# Altium PCB PCB2.PcbDoc
Units mil, origin at the board's own origin, x right, y up, seen from the top; angles counter-clockwise.
Board outline 3885 x 3930 mil, 2 copper layers (Top Layer, Bottom Layer); 38 components, 36 nets, 126 pads, 12 vias.
Unrouted connection lines stored in the file: 3.
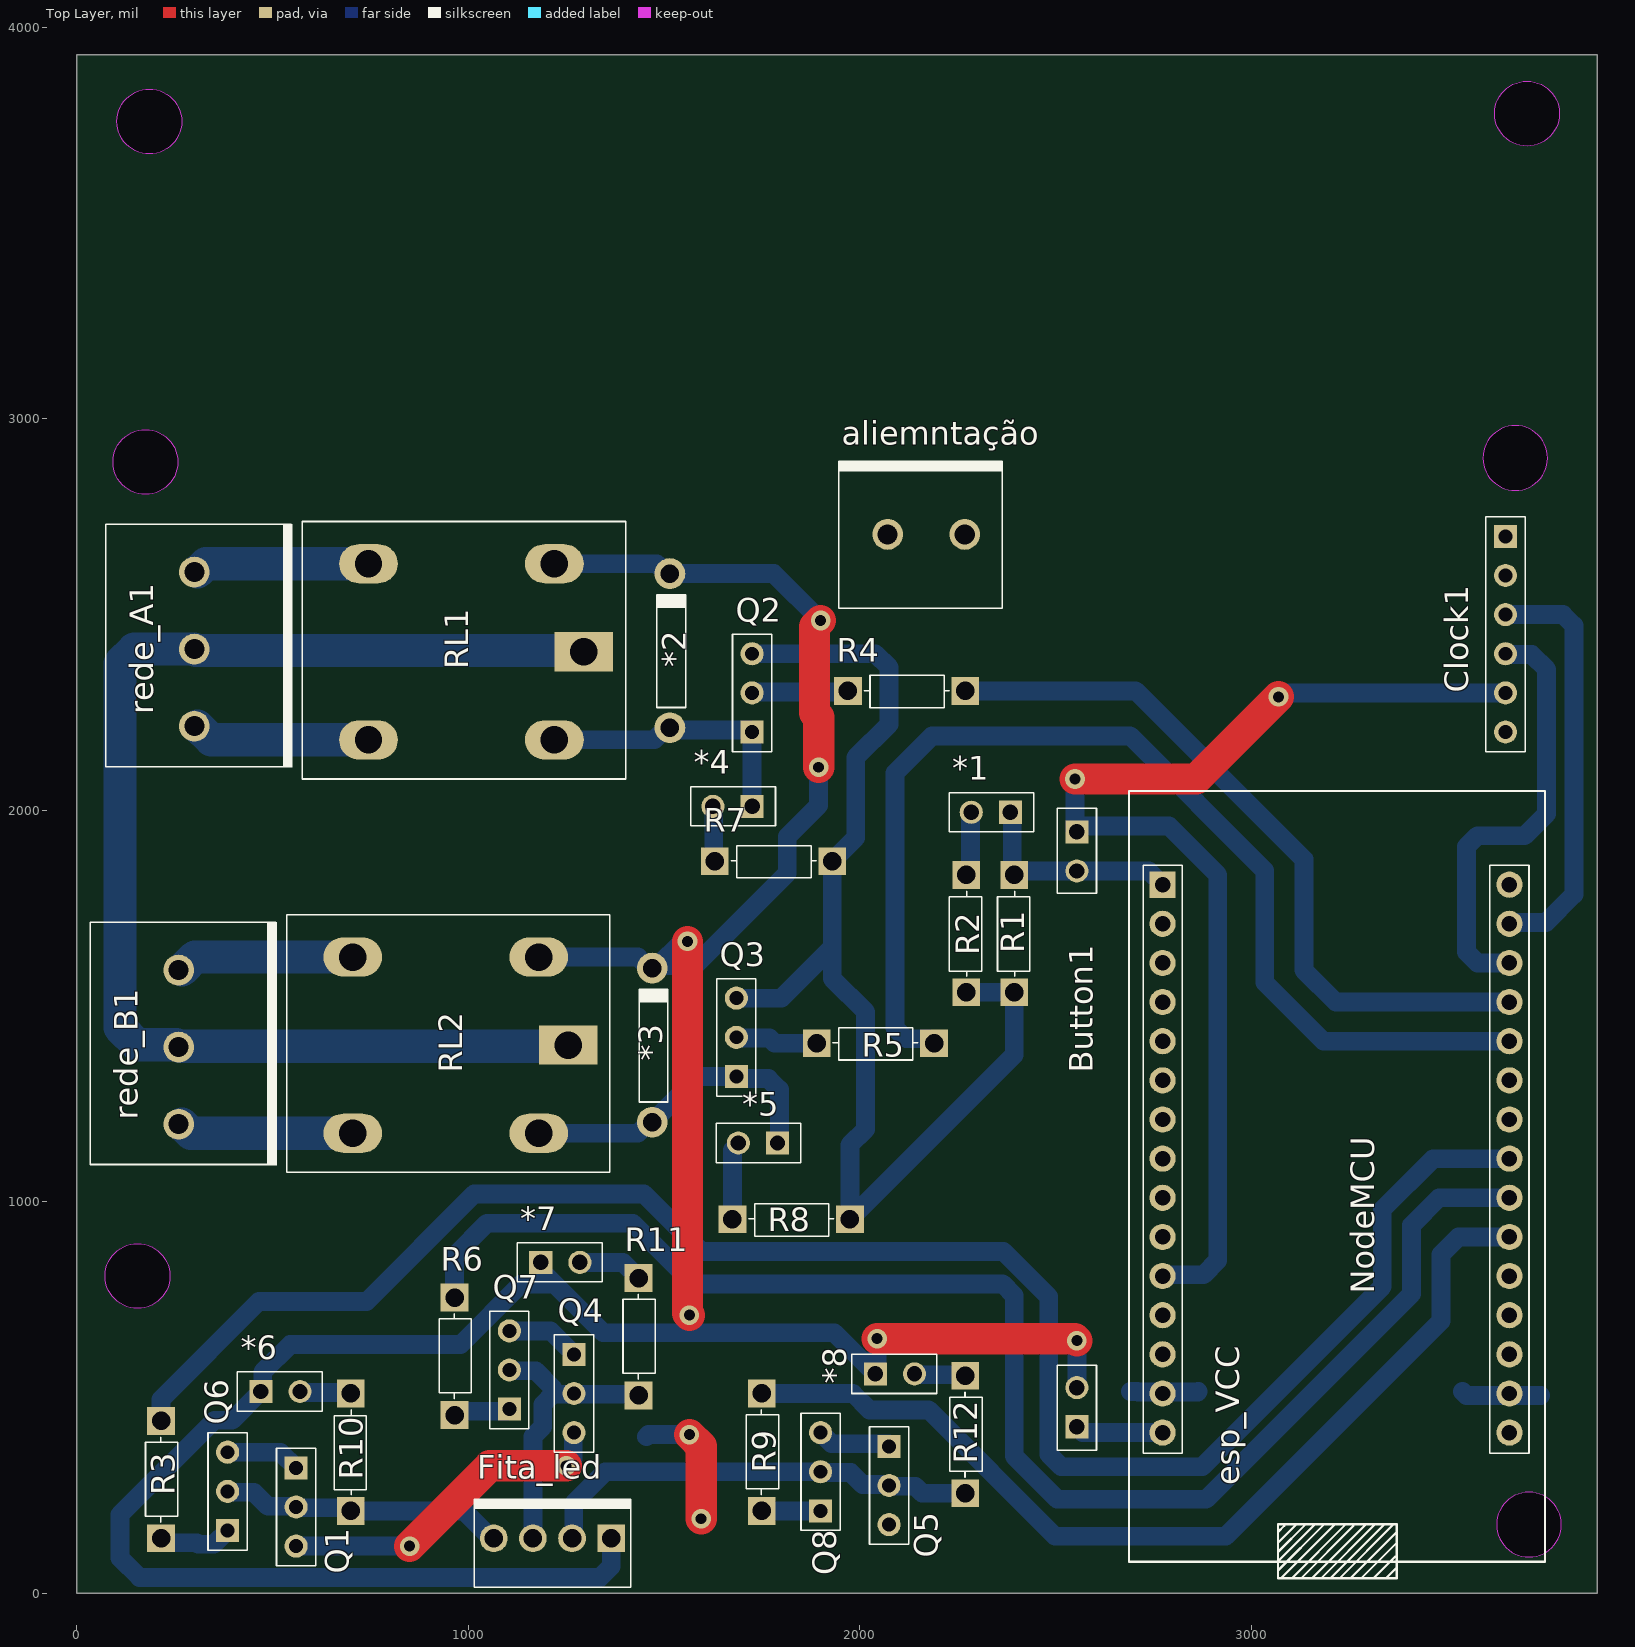
[diagram p0: Top Layer view]
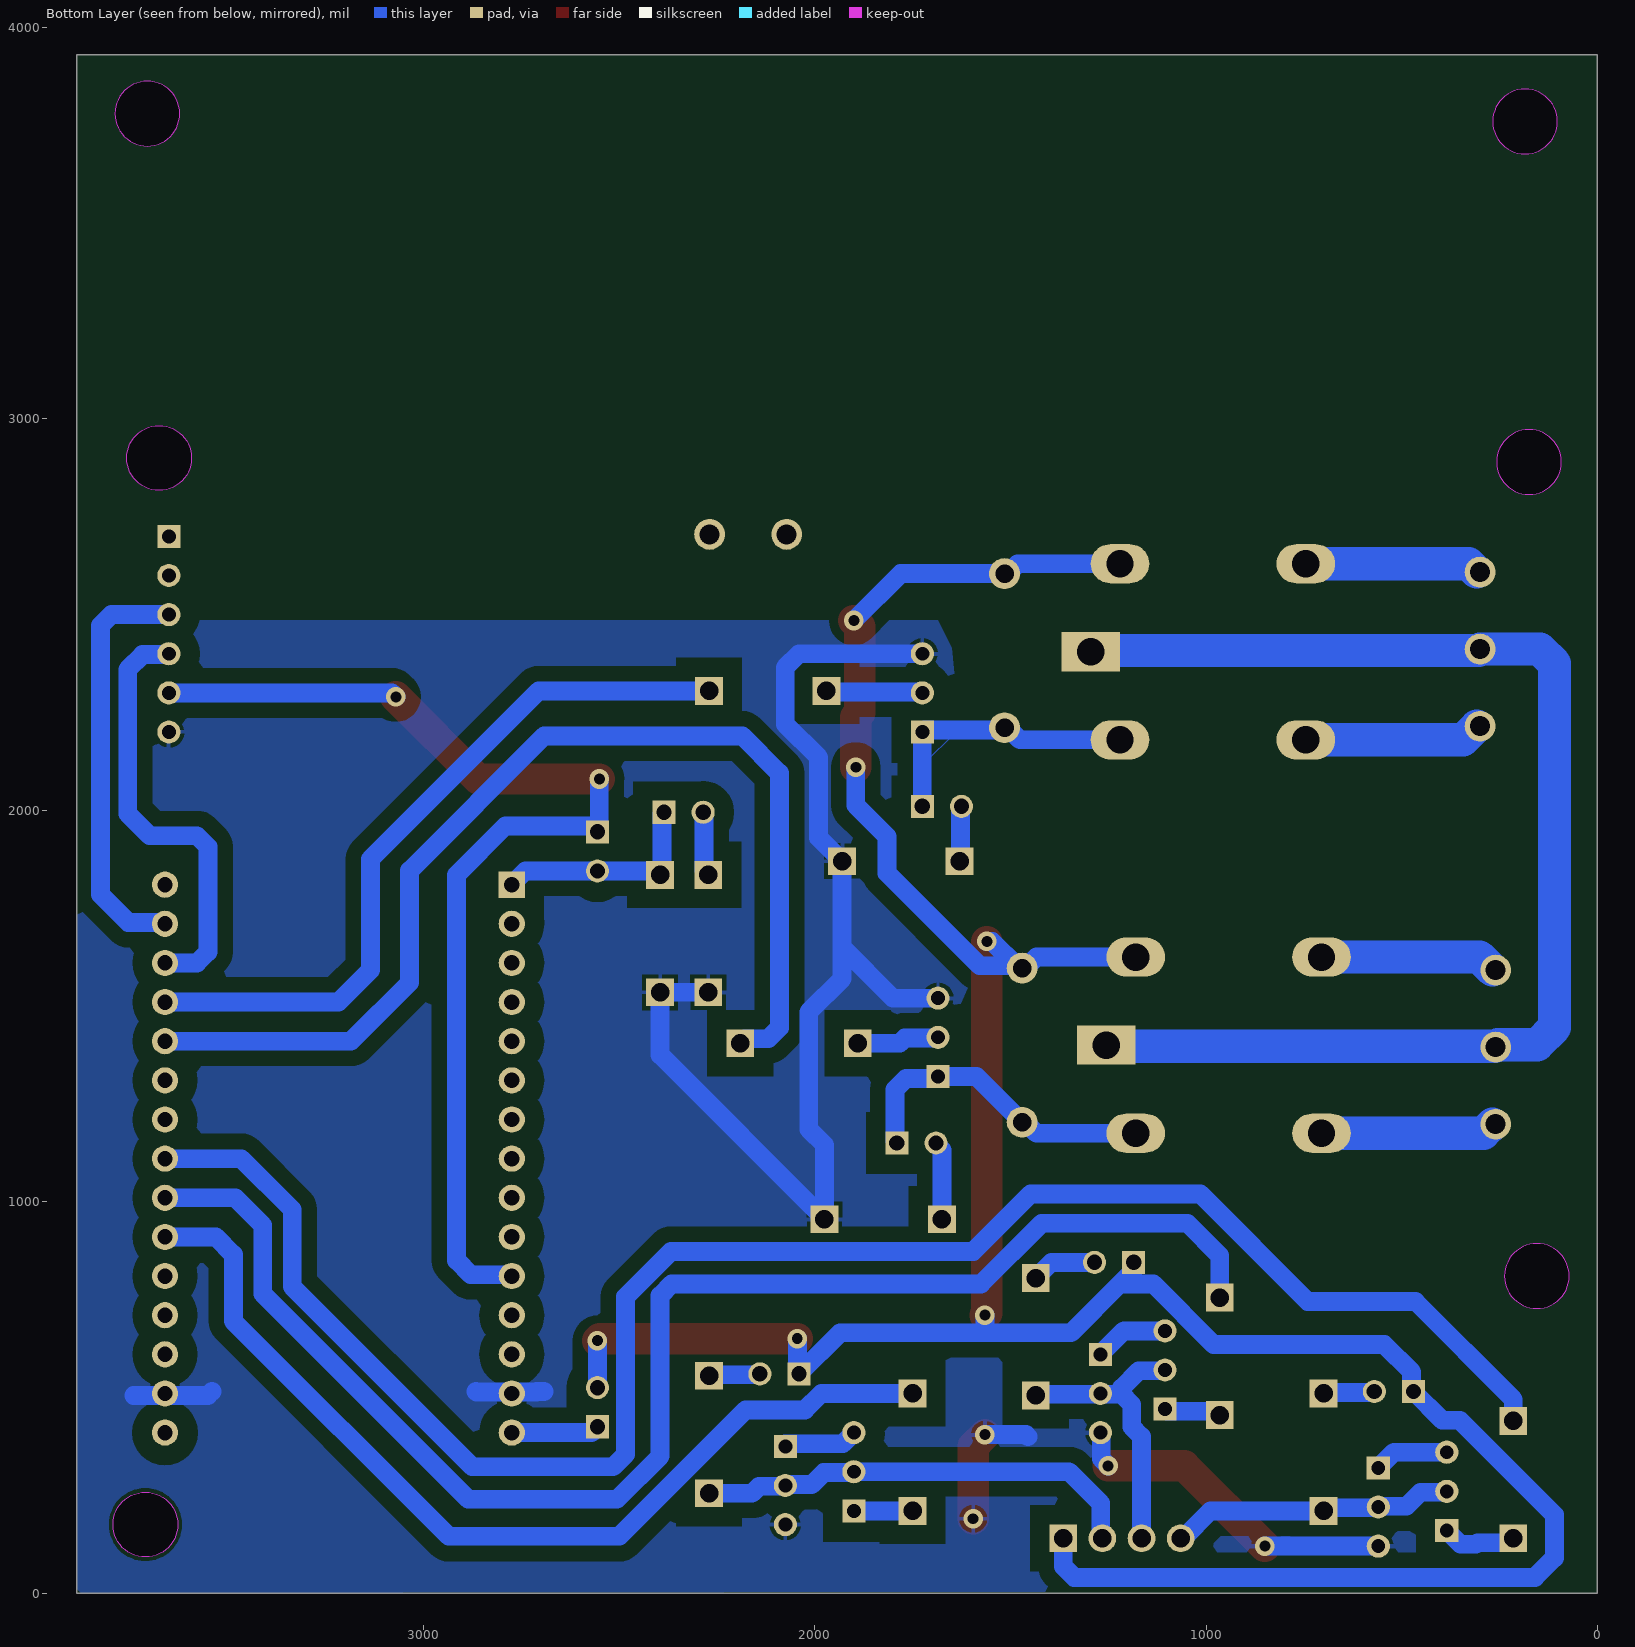
[diagram p1: Bottom Layer view, seen from below]
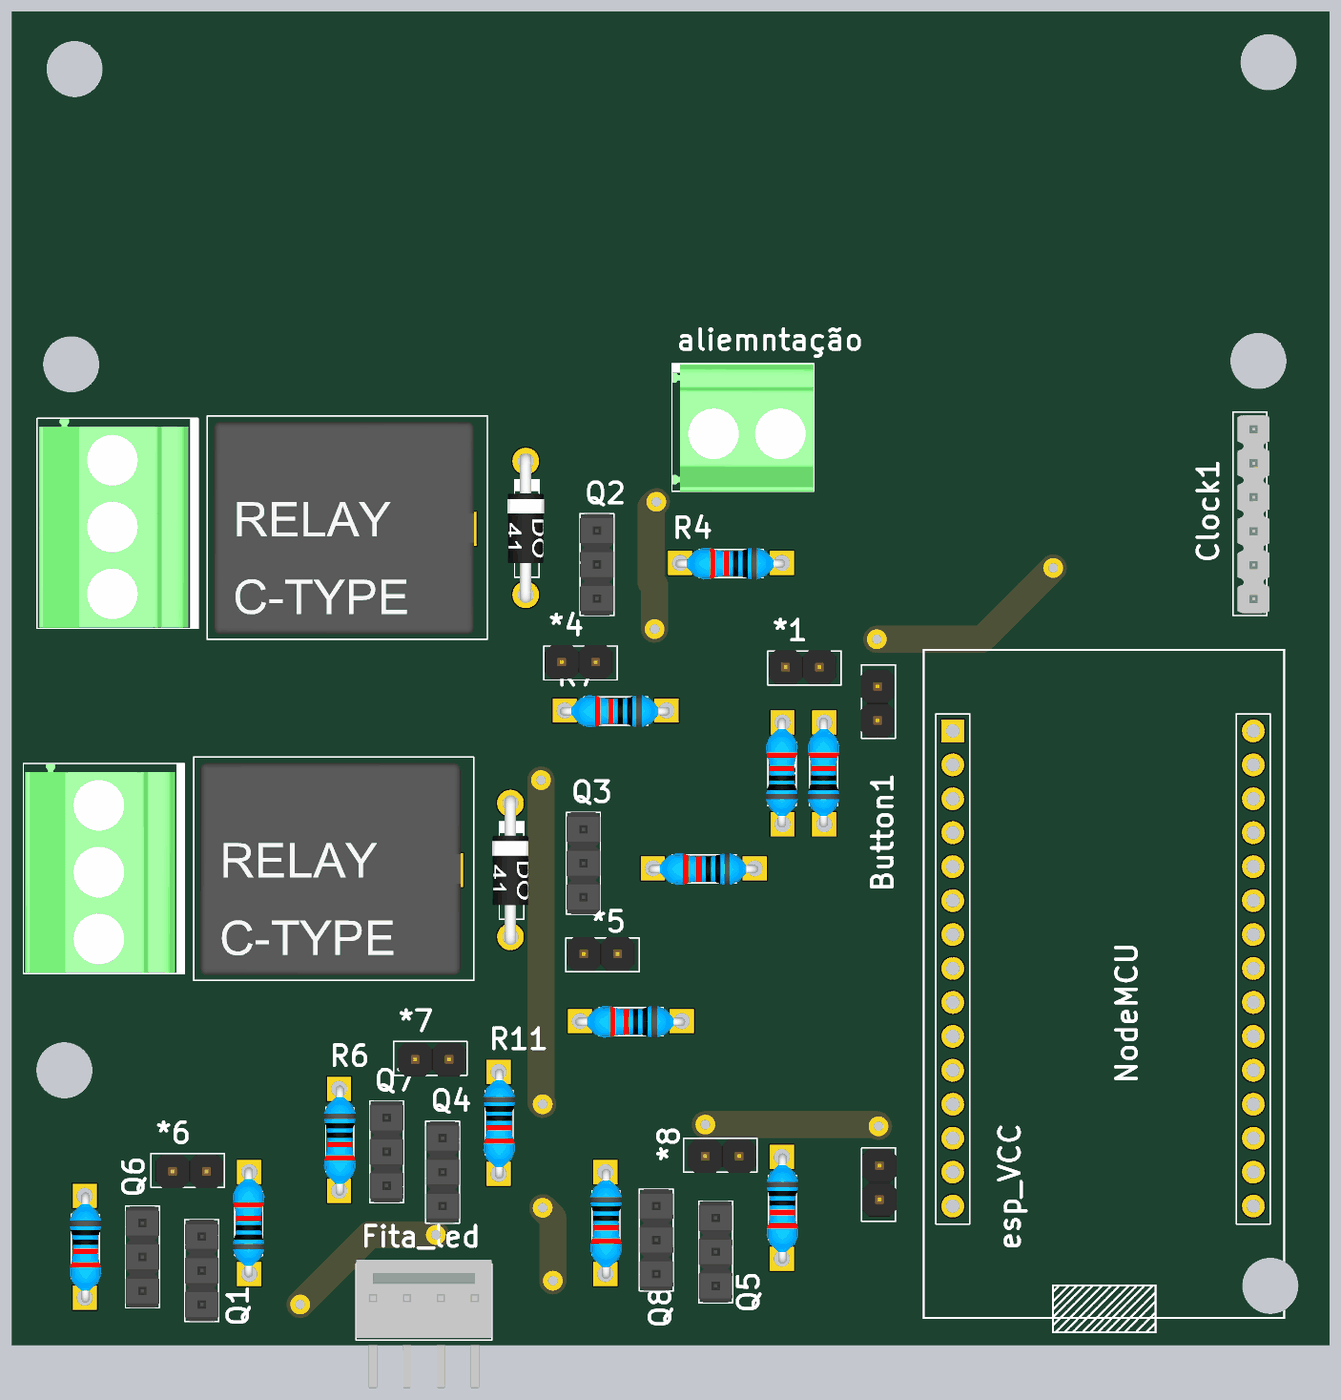
[diagram p2: 3D render of the assembled board from above, using the file's embedded part models]

## Layer stack, top to bottom
Top Solder: solder mask 0.4, Solder Resist, Dk 3.5
Top Layer: signal copper 1.4
Dielectric 1: dielectric 12.6, FR-4, Dk 4.8
Bottom Layer: signal copper 1.4
Bottom Solder: solder mask 0.4, Solder Resist, Dk 3.5

## Board outline
0,0 3885,0 3885,3930 0,3930
cut-out: 155,727.24 cw(c155,810) 72.24,810 cw(c155,810) 155,892.76 cw(c155,810) 237.76,810 cw(c155,810)
cut-out: 3627.24,175 ccw(c3710,175) 3710,92.24 ccw(c3710,175) 3792.76,175 ccw(c3710,175) 3710,257.76 ccw(c3710,175)
cut-out: 3705,3697.24 cw(c3705,3780) 3622.24,3780 cw(c3705,3780) 3705,3862.76 cw(c3705,3780) 3787.76,3780 cw(c3705,3780)
cut-out: 3592.24,2900 ccw(c3675,2900) 3675,2817.24 ccw(c3675,2900) 3757.76,2900 ccw(c3675,2900) 3675,2982.76 ccw(c3675,2900)
cut-out: 175,2807.24 cw(c175,2890) 92.24,2890 cw(c175,2890) 175,2972.76 cw(c175,2890) 257.76,2890 cw(c175,2890)
cut-out: 185,3677.24 cw(c185,3760) 102.24,3760 cw(c185,3760) 185,3842.76 cw(c185,3760) 267.76,3760 cw(c185,3760)

## Design rules (kind name [scope] priority, off if disabled: settings)
Clearance [All] p1: gap=10 ignorepadtopadclearanceinfootprint=FALSE except(0: Arc-Hole Track-Hole SMDPad-Hole THPad-Hole Via-Hole Text-Hole; 40: Arc-Fill Arc-Poly Arc-Region Track-Fill Track-Poly Track-Region; 50: THPad-Fill THPad-Poly THPad-Region Fill-Hole Poly-Hole Region-Hole)
PolygonConnect [All] p1: connectstyle=Relief reliefconductorwidth=10 reliefentries=4 polygonreliefangle="90 Angle" airgapwidth=10
RoutingVias [All] p1: holewidth=28 width=50 viastyle="Through Hole" minholewidth=28 minwidth=50 maxholewidth=28 maxwidth=50
SolderMaskExpansion [All] p1: expansion=4
Width [All] p1: maxlimit=90 minlimit=45 preferedwidth=80 toplayer_minwidth=80 toplayer_maxwidth=80 bottomlayer_prefwidth=48 minimp=50.000000 maximp=50.000000 favimp=50.000000
30 further rules are at their usual default settings.

## Classes and differential pairs
component class "Relógio digital": Clock1
component class "Relay de carga": *2 *3 *4 *5 Q2 Q3 R4 R5 R7 R8 rede_A1 rede_B1 RL1 RL2
component class "Microcontrolador ESP8266": aliemntação esp_VCC NodeMCU
component class "Fita LED": *6 *7 *8 Fita_led Q1 Q4 Q5 Q6 Q7 Q8 R3 R6 R9 R10 R11 R12
component class Botão: *1 Button1 R1 R2

## Components (designator, comment, footprint, x,y, rotation, side; value= is the part's Value field where it differs from the comment)
*1 "LED_AXIAL_5MM" HEADER_1X2 2335,1995 r180 top value=?
*2 "DIO_PTH_1N4007" DIO_PTH_DO41 1515,2407.95 r270 top value=?
*3 "DIO_PTH_1N4007" DIO_PTH_DO41 1470,1400 r270 top value=?
*4 "LED_AXIAL_5MM" HEADER_1X2 1675,2010 r180 top value=?
*5 "LED_AXIAL_5MM" HEADER_1X2 1740,1150 r180 top value=?
*6 "LED_AXIAL_5MM" HEADER_1X2 520,515 r0 top value=?
*7 "LED_AXIAL_5MM" HEADER_1X2 1235,845 r0 top value=?
*8 "LED_AXIAL_5MM" HEADER_1X2 2090,560 r0 top value=?
aliemntação "?" CN_KRE_2 2170,2705 r180 top
Button1 "?" HEADER_1X2 2555,1895 r270 top
Clock1 "HEADER_1X6" HEADER_1X6 3650,2450 r270 top value=?
esp_VCC "?" HEADER_1X2 2555,475 r90 top
Fita_led "CN_KK_4" CN_KK_4_5045-4 1215,140 r180 top value=?
NodeMCU "ESP8266 Development kit" DIV_NodeMCU_Socket 2683,77.57 r0 top
Q1 "NPN" HEADER_1X3 610,220 r270 top
Q2 "NPN" HEADER_1X3 1675,2300 r90 top
Q3 "NPN" HEADER_1X3 1635,1420 r90 top
Q4 "NPN" HEADER_1X3 1320,510 r270 top
Q5 "NPN" HEADER_1X3 2125,275 r270 top
Q6 "NPN" HEADER_1X3 335,260 r90 top
Q7 "NPN" HEADER_1X3 1055,570 r90 top
Q8 "NPN" HEADER_1X3 1850,310 r90 top
R1 "1M" RES_PTH_7.62MM 2395,1685 r90 top
R2 "" RES_PTH_7.62MM 2271.97,1685 r90 top value=330
R3 "10k" RES_PTH_7.62MM 215,290 r270 top
R4 "10k" RES_PTH_7.62MM 2120,2305 r180 top
R5 "10k" RES_PTH_7.62MM 2040,1405 r180 top
R6 "10k" RES_PTH_7.62MM 965,605 r270 top
R7 "330" RES_PTH_7.62MM 1780,1870 r180 top
R8 "330" RES_PTH_7.62MM 1825,955 r180 top
R9 "10k" RES_PTH_7.62MM 1750,360 r270 top
R10 "330" RES_PTH_7.62MM 700,360 r90 top
R11 "330" RES_PTH_7.62MM 1435,655 r270 top
R12 "330" RES_PTH_7.62MM 2270,405 r270 top
rede_A1 "?" CN_KRE_3 300,2411.85 r90 top
rede_B1 "?" CN_KRE_3 260,1395 r90 top
RL1 "RELEICR5551" DIV_RELE_5551 1020,2405 r0 top
RL2 "RELEICR5551" DIV_RELE_5551 980,1400 r0 top

## Footprints (in the part's own frame and the unit in brackets; to place one, negate y for a bottom-side part, rotate by r counter-clockwise, add the part's x,y. Pads: shape width x height; smd on the part's side, far side on the other; paste and mask are expansions set on the pad)
CN_KK_4_5045-4 [mm]
  rect 1.8x1.8 hole 1.2: 1(-3.81,0)
  round 1.8 hole 1.2: 2(-1.27,0) 3(1.27,0) 4(3.81,0)
  silkscreen extent -5.08,-2.54 5.08,3.18, body extent -5.08,-2.84 5.08,6.8, height 12.11
CN_KRE_2 [mm]
  round 2 hole 1.3: 1(-2.5,0) 2(2.5,0)
  silkscreen extent -4.93,-4.75 5.69,4.8, body extent -4.93,-4.7 5.64,4.8, height 15
CN_KRE_3 [mm]
  round 2 hole 1.3: 1(-5,0) 2(0,0) 3(5,0)
  silkscreen extent -7.67,-6.38 8.1,5.74, body extent -7.53,-5.61 8.04,5.59, height 18
DIO_PTH_DO41 [mm]
  round 2 hole 1.2: A(5,0) K(-5,0)
  silkscreen extent -3.62,-0.86 3.69,1.02, body extent -5.65,-1.36 5.71,1.36, height 1.36
DIV_NodeMCU_Socket [mm]
  rect 1.7x1.7 hole 1: 1(2.31,44.004)
  round 1.7 hole 1: 2(2.31,41.464) 3(2.31,38.924) 4(2.31,36.384) 5(2.31,33.844) 6(2.31,31.304) 7(2.31,28.764) 8(2.31,26.224) 9(2.31,23.684) 10(2.31,21.144) 11(2.31,18.604) 12(2.31,16.064) 13(2.31,13.524) 14(2.31,10.984) 15(2.31,8.444) 16(24.816,8.444) 17(24.816,10.984) 18(24.816,13.524) 19(24.816,16.064) 20(24.816,18.604) 21(24.816,21.144) 22(24.816,23.684) 23(24.816,26.224) 24(24.816,28.764) 25(24.816,31.304) 26(24.816,33.844) 27(24.816,36.384) 28(24.816,38.924) 29(24.816,41.464) 30(24.816,44.004)
  silkscreen extent 0.13,-1 27.13,50.08
DIV_RELE_5551 [mil]
  rect 150x100 hole 70: 1(275,0)
  oval 150x100 hole 70: 2(-275,-225) 3(-275,225) 4(200,225) 5(200,-225)
  silkscreen extent -444,-325 382,333, body extent -425,-310 343,316, height 87
HEADER_1X2 [mm]
  rect 1.5x1.5 hole 1: 1(-1.27,0)
  round 1.5 hole 1: 2(1.27,0)
  silkscreen extent -2.79,-1.27 2.71,1.27, body extent -2.44,-1.34 2.64,1.2, height 8.5
HEADER_1X3 [mm] "Connector; Header; 3x2 Position"
  rect 1.5x1.5 hole 0.9: 1(-2.54,-1.27)
  round 1.5 hole 0.9: 2(0,-1.27) 3(2.54,-1.27)
  silkscreen extent -3.81,-2.54 3.81,0, body extent -3.81,-2.54 3.81,0, height 9.5
HEADER_1X6 [mm] "Connector; Header; 6 Position"
  rect 1.5x1.5 hole 0.9: 1(-6.35,0)
  round 1.5 hole 0.9: 2(-3.81,0) 3(-1.27,0) 4(1.27,0) 5(3.81,0) 6(6.35,0)
  silkscreen extent -7.62,-1.27 7.62,1.27, body extent -7.38,-3.55 7.46,1.48, height 8.56
RES_PTH_7.62MM [mm]
  rect 1.8x1.8 hole 1.2: 1(-3.81,0) 2(3.81,0)
  silkscreen extent -2.76,-1.01 2.76,1.09, body extent -4.06,-1.15 4.16,1.25, height 3.2

## Part data
aliemntação esp_VCC: library part CN_MKDS_2, "MKDS_2"
Button1: library part HEADER_1X2, "1X2"
Clock1: "1X6"
Fita_led: "KK_4"
NodeMCU: library part NodeMCU, Reference=https://bennthomsen.files.wordpress.com/2015/12/nodemcu_pinout_700-2.png, Schematic=https://raw.githubusercontent.com/nodemcu/nodemcu-devkit/master/Documents/NODEMCU_DEVKIT_SCH.png
Q1 Q2 Q3 Q4 Q5 Q6 Q7 Q8: "NPN Bipolar Transistor", Code_JEDEC=TO-226-AA, LatestRevisionDate=17-Jul-2002, LatestRevisionNote="Re-released for DXP Platform.", PackageDescription="TO, Flat Index; 3 In-Line, Axial Leads; Body Dia. 4.8mm; Leads 0.55 x 0.51 mm (max)", PackageReference=TO-226-AA, Published=8-Jun-2000, Publisher="Altium Limited"
R1 R2 R3 R4 R5 R6 R7 R8 R9 R10 R11 R12: library part RES_PTH_7.62MM, "Pin Through Hole Resistor 7.62mm"
rede_A1 rede_B1: library part CN_MKDS_3, "MKDS_3"

## Via types
v1: diameter 50, hole 28, Top Layer to Bottom Layer, 12 vias

## Nets (pads, with @x,y where several pads share a name; then routed paths per layer and width w, separated by ;. In a path a pad name is that pad's centre, name@x,y a point inside that pad or via, vN(x,y) a via of type N, cw(c..) or ccw(c..) an arc to the next point about the centre after c; other vN are vias at no path point)
+3v3: Button1.1 Clock1.5 NodeMCU.11 | length 2888.8
  Top Layer w80: v1(2550,2080) 2860,2080 v1(3070,2290)
  Bottom Layer w48: v1(2550,2080) 2550.38,2079.62 2550.38,1949.62 Button1.1 2570,1960 2790,1960 2915,1835 2915,850 2878.62,813.62 2777.57,813.62 NodeMCU.11 ; v1(3070,2290) 3070.54,2290 3080.54,2300 Clock1.5
+12: *2.K *3.K *6.1 *7.1 *8.1 aliemntação.1 esp_VCC.2 Fita_led.1 RL1.4 RL2.4 | length 7850.1
  Top Layer w10: v1(1560,1665) v1@1562.5,1662.5 ; v1(1895,2110) v1@1897.5,2112.5 ; v1(2044.53,650) v1@2047.03,647.5
  Top Layer w80: v1(1560,1665) 1560,715 v1(1565,710) ; v1(1895,2110) 1895,2238.42 1884.57,2248.86 1884.57,2469.57 v1(1900,2485) ; v1(2044.53,650) 2550,650 v1(2555,645)
  Bottom Layer w48: RL2.4 1433.53,1625 1461.68,1596.85 *3.K 1478.32,1596.85 *3.K@1484.2,1602.73 ; *7.1 1185,825 1220,790 ; RL1.4 1481.49,2630 1506.68,2604.8 *2.K 1780.2,2604.8 v1(1900,2485) ; Fita_led.1 1365,68.12 1336.88,40 160,40 110,90 110,200 351.59,441.59 396.59,441.59 *6.1 475,520 475,565 545,635 980.16,635 1135.16,790 1220,790 ; v1(1560,1665) 1559.62,1664.62 1546.09,1664.62 *3.K@1484.2,1602.73 ; v1(1565,710) 1565,665 ; v1(1895,2110) 1895,2012.88 1815,1932.88 1815,1839.4 1578.33,1602.73 *3.K@1484.2,1602.73 ; v1(2044.53,650) 2044.14,649.62 2044.14,564.14 *8.1 1935,665 1565,665 ; esp_VCC.2 v1(2555,645) ; 1220,790 1345,665 1565,665
GND: aliemntação.2 Clock1.6 NodeMCU.14 NodeMCU.17 Q1.3 Q2.3 Q3.3 Q4.3 Q5.3 R1.1 R2.1 R7.1 R8.1 | length 4651.6
  Top Layer w80: v1(850,120) 1055,325 v1(1250.07,325) ; v1(1565,405) 1595,375 v1(1595,190)
  Bottom Layer w48: Q1.3 v1(850,120) ; v1(1250.07,325) 1250.07,325.54 1267.88,343.36 1267.88,407.88 Q4.3 ; 1455,399.68 1460.32,405 v1(1565,405) ; Q3.3 1800,1520 1930,1650 ; Q2.3 2040,2400 2075,2365 2075,2220 1990,2135 1990,1930 R7.1 1930,1650 ; R2.1 R1.1 2395,1375 R8.1 1975,1145 2015,1185 2015,1485 1930,1570 1930,1650 ; 2691.7,515 2710,515 2711.38,513.62 2770.33,513.62 NodeMCU.14 2777.57,513.62 2863.62,513.62 2865,515 ; 3540,515 3550,505 3740,505
Net*1_A: *1.1 Button1.2 NodeMCU.1 R1.2 | length 561.7
  Bottom Layer w48: *1.1 2390,1990 2390,1840 R1.2 2405,1845 Button1.2 2738.95,1845 NodeMCU.1
Net*1_K: *1.2 R2.2 | length 165.4
  Bottom Layer w48: R2.2 2282.88,1845.92 2282.88,1992.88 *1.2
Net*2_A: *2.A *4.1 Q2.1 RL1.5 | length 712.5
  Bottom Layer w48: RL1.5 1475.58,2180 1506.68,2211.1 *2.A 1520.58,2205.53 1719.47,2205.53 Q2.1 *4.1
Net*3_A: *3.A *5.1 Q3.1 RL2.5 | length 827.4
  Bottom Layer w48: RL2.5 1433.53,1175 1461.68,1203.15 *3.A 1586.85,1320 Q3.1 1690.53,1314.47 1766.88,1314.47 1795,1286.35 1795,1155 *5.1
Net*4_K: *4.2 R7.2 | length 142.1
  Bottom Layer w48: *4.2 1627.12,2007.88 1627.12,1872.88 R7.2
Net*5_K: *5.2 R8.2 | length 201.2
  Bottom Layer w48: R8.2 1675,1132.01 1690,1147.01 *5.2
Net*6_K: *6.2 R10.2 | length 132.1
  Bottom Layer w48: *6.2 572.12,512.88 697.12,512.88 R10.2
Net*7_K: *7.2 R11.1 | length 166.6
  Bottom Layer w48: *7.2 1395,845 R11.1
Net*8_K: *8.2 R12.1 | length 132.1
  Bottom Layer w48: *8.2 2142.12,557.88 2267.12,557.88 R12.1
NetClock1_3: Clock1.3 NodeMCU.29 | length 1069.6
  Bottom Layer w48: Clock1.3 3796.88,2500 3825,2471.88 3825,1785 3753.62,1713.62 3663.62,1713.62 NodeMCU.29
NetClock1_4: Clock1.4 NodeMCU.28 | length 1120.6
  Bottom Layer w48: Clock1.4 3652.12,2397.88 3717.12,2397.88 3755,2360 3755,1991.38 3698.62,1935 3578.12,1935 3550,1906.88 3550,1638.12 3578.12,1610 NodeMCU.28
Netesp_VCC_1: esp_VCC.1 NodeMCU.15 | length 225.2
  Bottom Layer w48: esp_VCC.1 2570,410 NodeMCU.15
NetFita_led_2: Fita_led.2 Q5.2 Q8.2 R12.2 | length 1148
  Bottom Layer w48: Fita_led.2 1269.38,144.38 1269.38,229.38 1350,310 Q8.2 1902.12,307.88 1977.12,307.88 2007.88,277.12 2072.88,277.12 Q5.2 2077.12,272.88 2142.12,272.88 2160,255 R12.2
NetFita_led_3: Fita_led.3 Q4.2 Q7.2 R11.2 | length 757.1
  Bottom Layer w48: Q7.2 1107.12,567.88 1172.12,567.88 1216,524 1216,507.88 ; Fita_led.3 1165,400 1190,425 1190,481.88 1216,507.88 ; R11.2 1432.12,507.88 1272.12,507.88 Q4.2 1267.88,507.88 1216,507.88
NetFita_led_4: Fita_led.4 Q1.2 Q6.2 R10.1 | length 729.7
  Bottom Layer w48: Q6.2 387.12,257.88 452.12,257.88 487.88,222.12 557.88,222.12 Q1.2 562.12,217.88 692.12,217.88 R10.1 988.81,210 1058.81,140 Fita_led.4
NetNodeMCU_21: NodeMCU.21 R9.1 | length 2477.6
  Bottom Layer w48: R9.1 1982.86,510 2024.86,468 2175.95,468 2498.95,145 2935,145 3485,695 3485,865 3530,910 NodeMCU.21
NetNodeMCU_22: NodeMCU.22 R6.1 | length 3790.3
  Bottom Layer w48: R6.1 965,862.43 1047.57,945 1420,945 1575,790 2365,790 2395,760 2395,350 2505,240 2885,240 3410,765 3410,940 3480,1010 NodeMCU.22
NetNodeMCU_23: NodeMCU.23 R3.1 | length 4683
  Bottom Layer w48: R3.1 215,495 465,745 740,745 1015,1020 1448,1020 1595,873 2367,873 2483,757 2483,355 2515,323 2875,323 3335,783 3335,980 3465,1110 NodeMCU.23
NetNodeMCU_26: NodeMCU.26 R5.1 | length 2866.8
  Bottom Layer w48: R5.1 2178.57,1416.43 2118.12,1416.43 2090,1444.55 2090,2095 2185,2190 2690.92,2190 3035,1845.92 3035,1560 3185,1410 NodeMCU.26
NetNodeMCU_27: NodeMCU.27 R4.1 | length 1885.2
  Bottom Layer w48: R4.1 2705,2305 3135,1875 3135,1591.85 3216.85,1510 NodeMCU.27
NetQ1_2: Q1.1 Q6.3 | length 191.6
  Bottom Layer w48: Q6.3 520,360 Q1.1
NetQ2_2: Q2.2 R4.2 | length 247.1
  Bottom Layer w48: Q2.2 1727.12,2302.12 1967.12,2302.12 R4.2
NetQ3_2: Q3.2 R5.2 | length 211.2
  Bottom Layer w48: Q3.2 1687.12,1417.88 1769.68,1417.88 1782.57,1405 R5.2
NetQ4_2: Q4.1 Q7.3 | length 189.9
  Bottom Layer w48: Q7.3 1210,670 Q4.1
NetQ5_2: Q5.1 Q8.3 | length 193.5
  Bottom Layer w48: Q8.3 1928.19,381.81 2075,381.81 Q5.1
NetQ6_2: Q6.1 R3.2 | length 190.7
  Bottom Layer w48: R3.2 226.43,128.57 306.67,128.57 310.24,125 350,125 Q6.1
NetQ7_2: Q7.1 R6.2 | length 146.2
  Bottom Layer w48: R6.2 974.47,464.47 1099.47,464.47 Q7.1
NetQ8_2: Q8.1 R9.2 | length 150
  Bottom Layer w48: R9.2 Q8.1
Netrede_A1_1: rede_A1.1 RL1.2 | length 459.5
  Bottom Layer w48: rede_A1.1 rede_A1.1@308.32,2215
  Bottom Layer w85: rede_A1.1@308.32,2215 343.32,2180 RL1.2
Netrede_A1_2: rede_A1.2 rede_B1.2 RL1.1 RL2.1 | length 3300.9
  Bottom Layer w48: rede_B1.2@254.12,1400.88 rede_B1.2 rede_B1.2@262.5,1397.5 ; rede_A1.2 rede_A1.2@303.42,2408.43 ; RL2.1@1252.5,1397.5 RL2.1 ; RL1.1@1291.58,2408.43 RL1.1
  Bottom Layer w85: rede_B1.2@254.12,1400.88 154.12,1400.88 110,1445 110,2375 146.85,2411.85 rede_A1.2 ; rede_B1.2@262.5,1397.5 RL2.1@1252.5,1397.5 ; rede_A1.2@303.42,2408.43 RL1.1@1291.58,2408.43
Netrede_A1_3: rede_A1.3 RL1.3 | length 453.8
  Bottom Layer w48: rede_A1.3 rede_A1.3@308.32,2608.7
  Bottom Layer w85: rede_A1.3@308.32,2608.7 329.62,2630 RL1.3
Netrede_B1_1: rede_B1.1 RL2.2 | length 454.6
  Bottom Layer w48: rede_B1.1 rede_B1.1@268.32,1198.15
  Bottom Layer w85: rede_B1.1@268.32,1198.15 291.47,1175 RL2.2
Netrede_B1_3: rede_B1.3 RL2.3 | length 458.7
  Bottom Layer w48: rede_B1.3 rede_B1.3@268.32,1591.85
  Bottom Layer w85: rede_B1.3@268.32,1591.85 301.47,1625 RL2.3
pads on no net: Clock1.1 Clock1.2 NodeMCU.2 NodeMCU.3 NodeMCU.4 NodeMCU.5 NodeMCU.6 NodeMCU.7 NodeMCU.8 NodeMCU.9 NodeMCU.10 NodeMCU.12 NodeMCU.13 NodeMCU.16 NodeMCU.18 NodeMCU.19 NodeMCU.20 NodeMCU.24 NodeMCU.25 NodeMCU.30

## Polygon pours and split planes (outlines as drawn)
Net*2_A on Bottom Layer "NET*2_A_L02_P006" (solid, remove dead copper, pour order 6): 1725,2115 1635,2205 1720,2205 1725,2200
GND on Bottom Layer "GND_L02_P004" (solid, remove dead copper, pour order 4): 0,5 1650,1450 1577.5,1622.5 1650,2415 1685,2485 3885,2485 3885,0

## Silkscreen, mask and mechanical layers (free items; w line width, h text height)
Mechanical 1:
  circle w10: c3675,2900 r82.76
  circle w10: c175,2890 r82.76
  circle w10: c155,810 r82.76
  circle w10: c185,3760 r82.76
  circle w10: c3705,3780 r82.76
  circle w10: c3710,175 r82.76
  pour cut-out: 185,3677.24 cw(c185,3760) 102.24,3760 cw(c185,3760) 185,3842.76 cw(c185,3760) 267.76,3760 cw(c185,3760)
  lines w10: 3885,3925 3885,0 0,0 0,3930 3885,3930

## Dimensions
0,0 to 3885,0 on Mechanical 1
0,0 to 0,3930 on Mechanical 1